# Altium PCB mimosa_host_fsr.PcbDoc
Units mil, origin at the board's own origin, x right, y up, seen from the top; angles counter-clockwise.
Board outline 1850.39 x 1850.39 mil, 2 copper layers (Top Layer, Bottom Layer), stack 33.8 mil thick; 50 components, 39 nets, 227 pads, 87 vias.
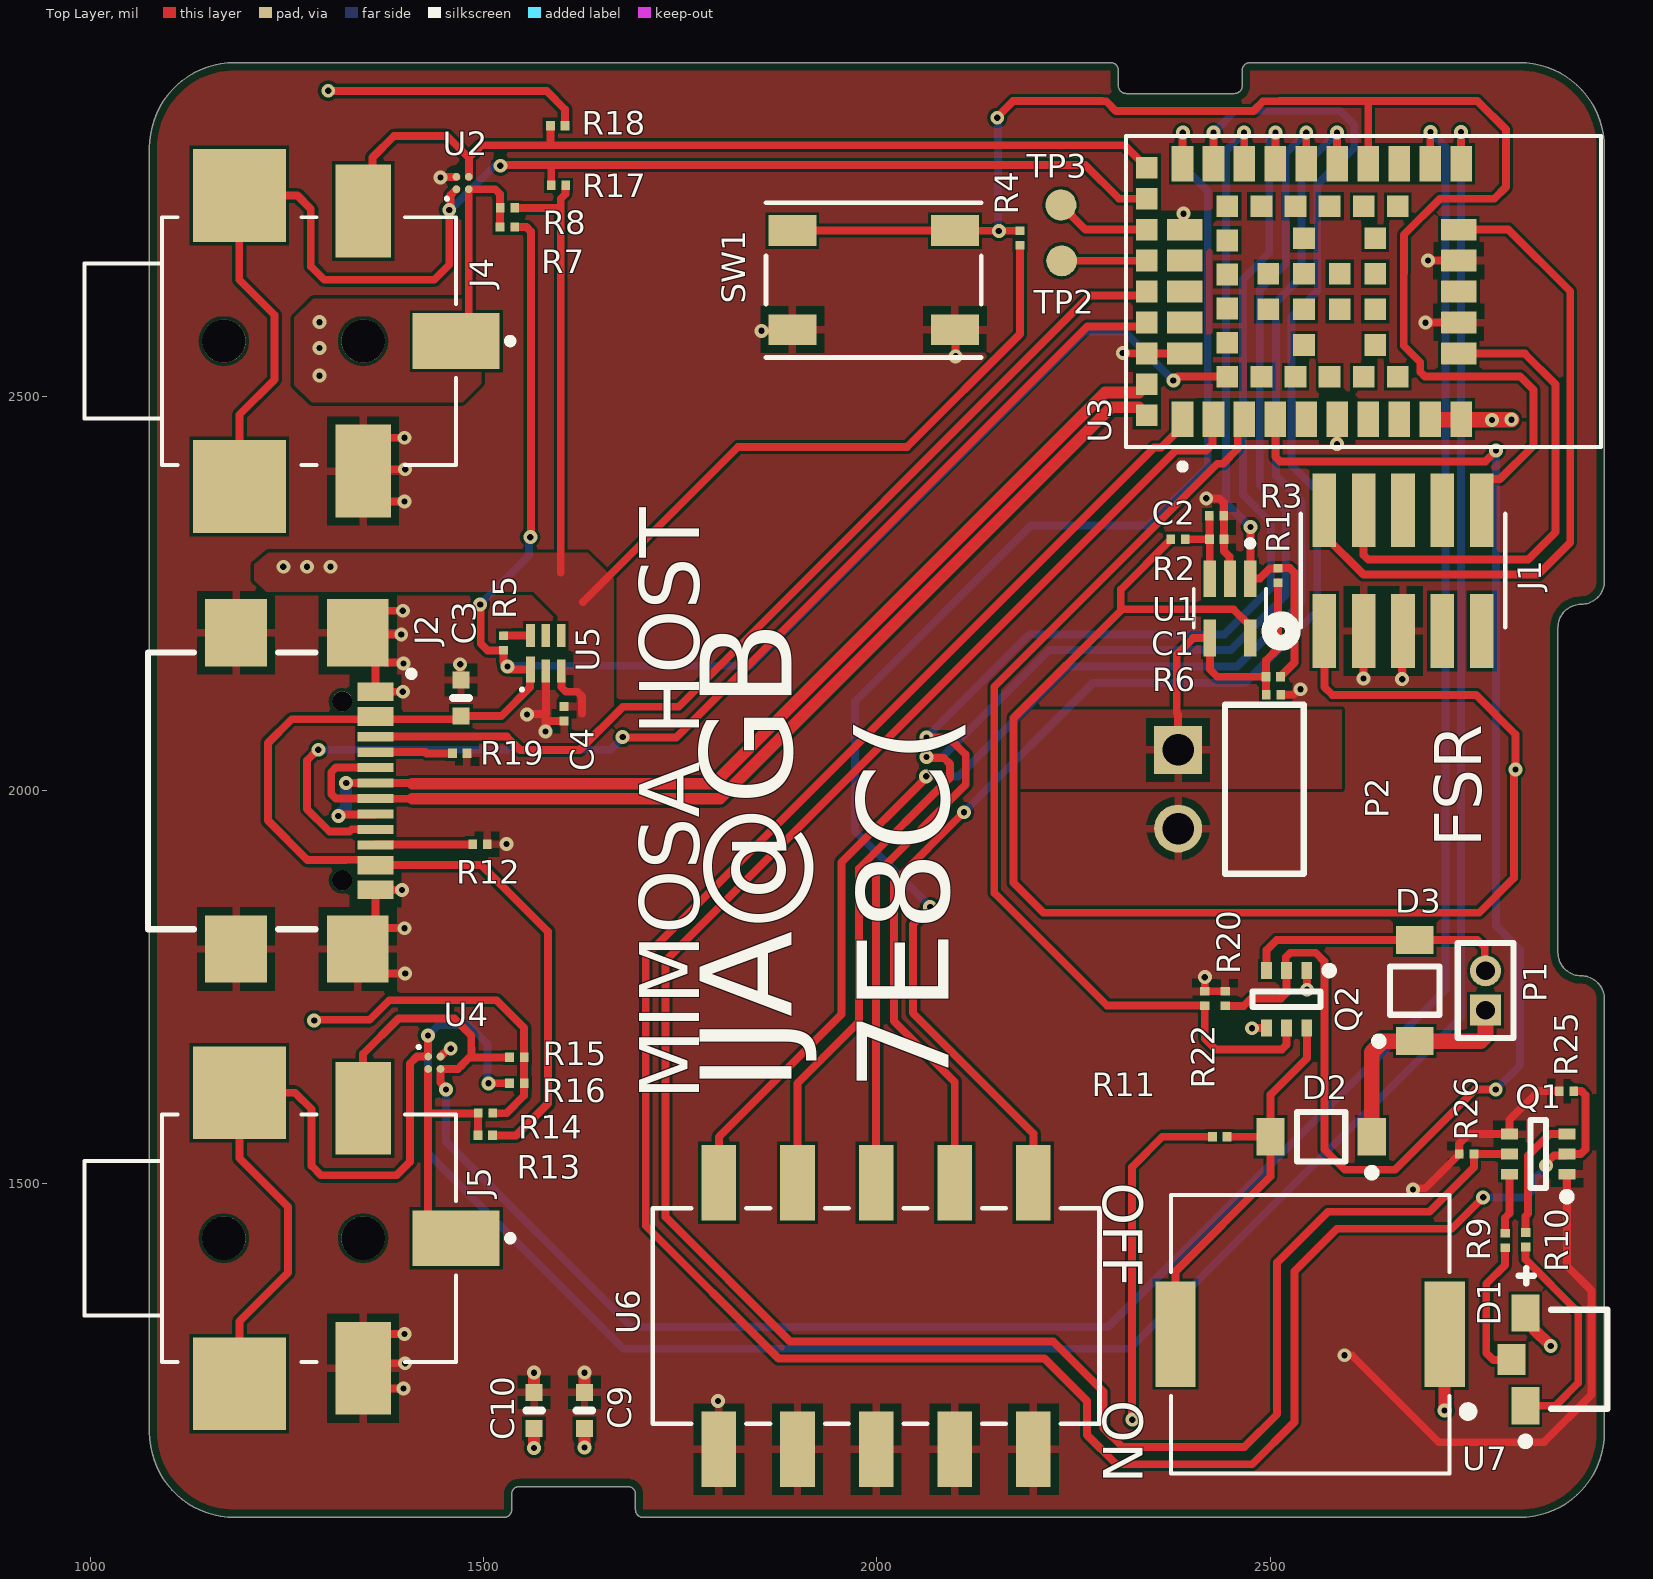
[diagram p0: Top Layer view]
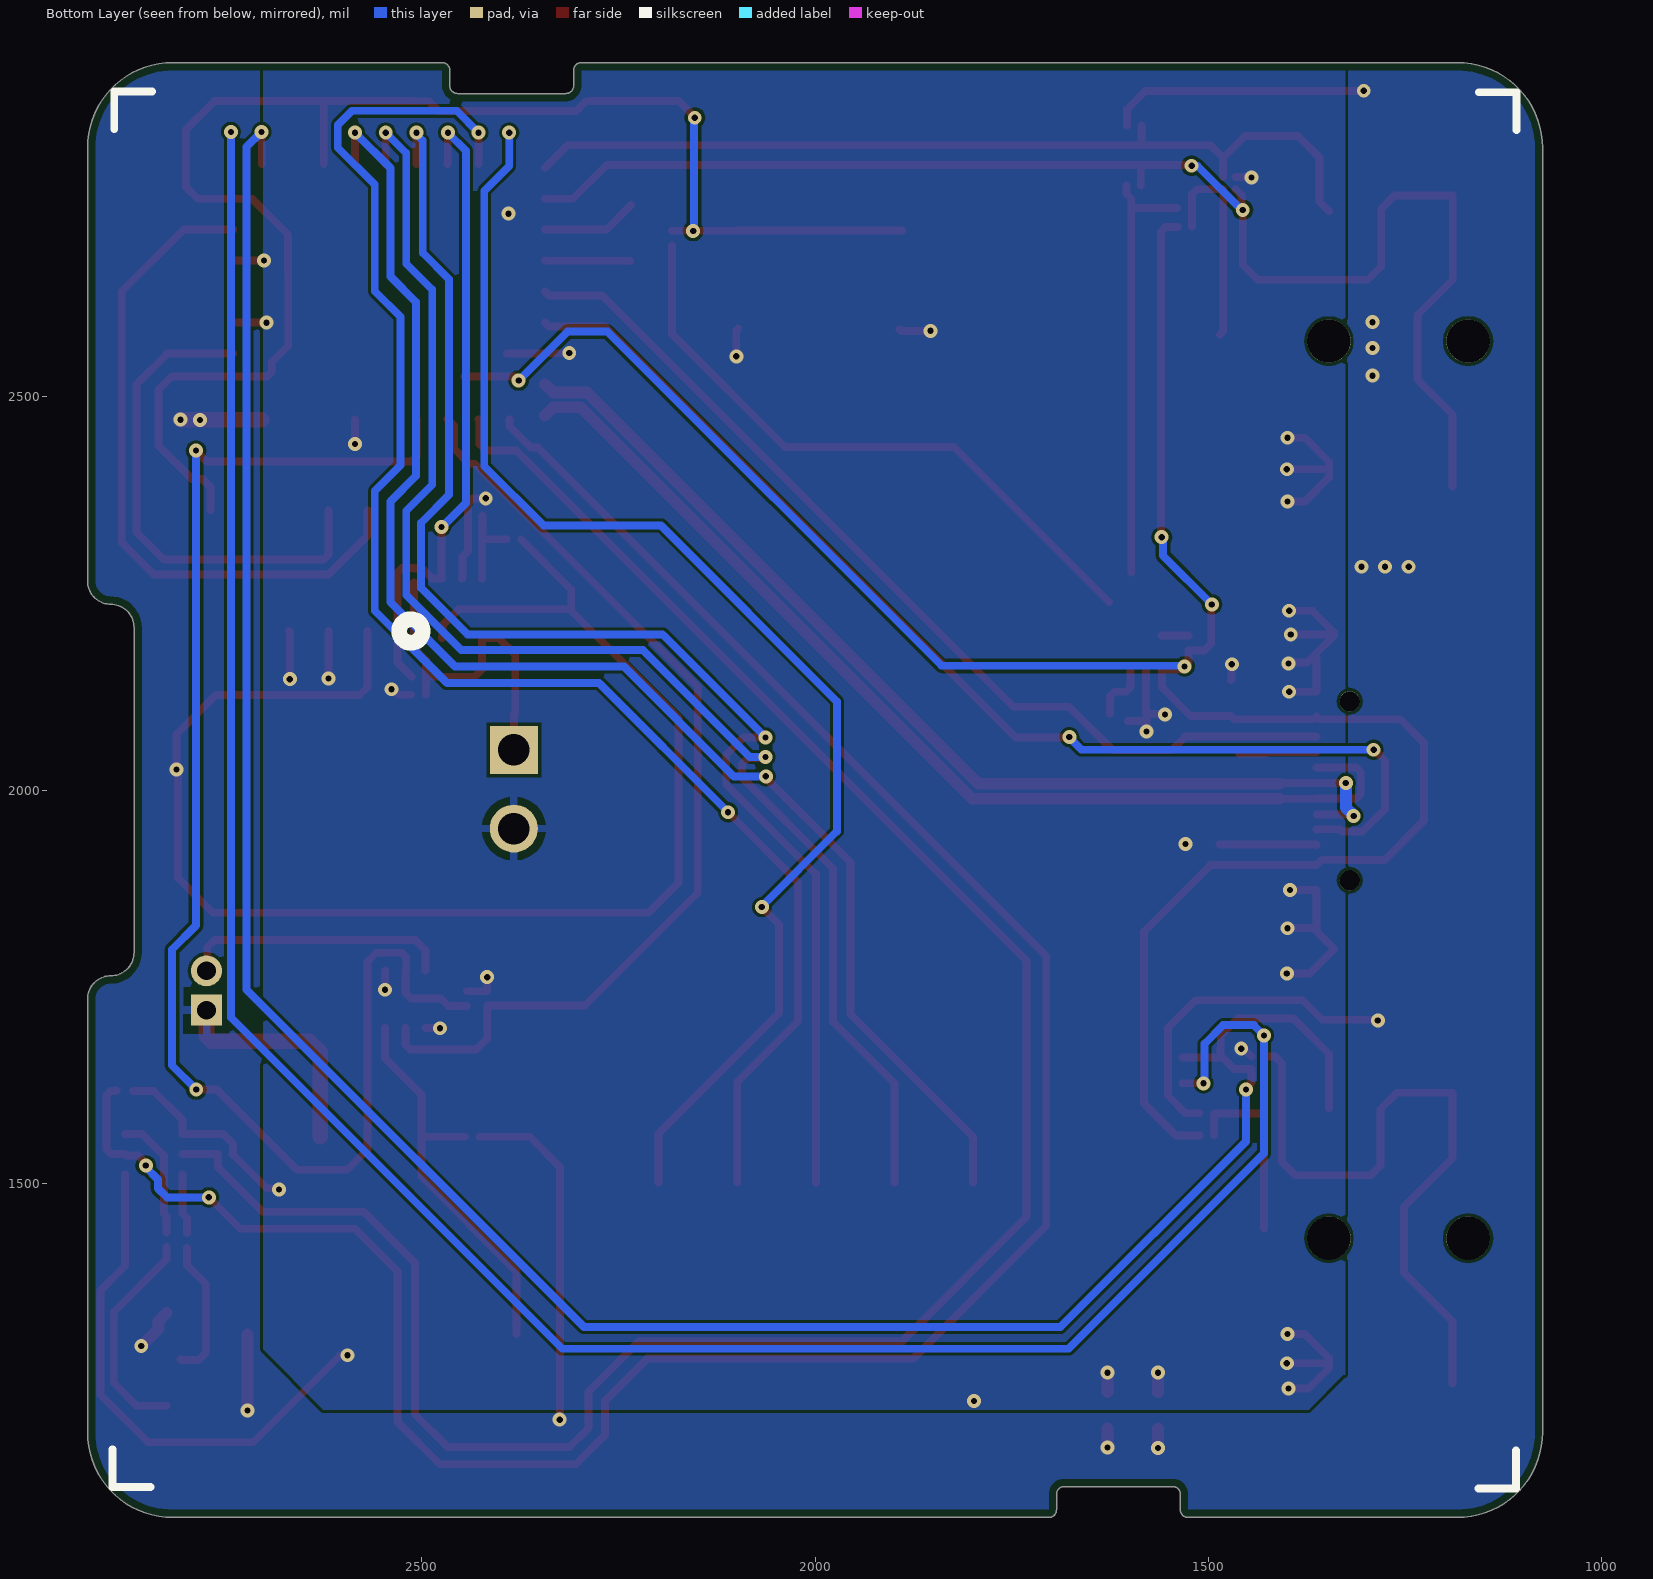
[diagram p1: Bottom Layer view, seen from below]
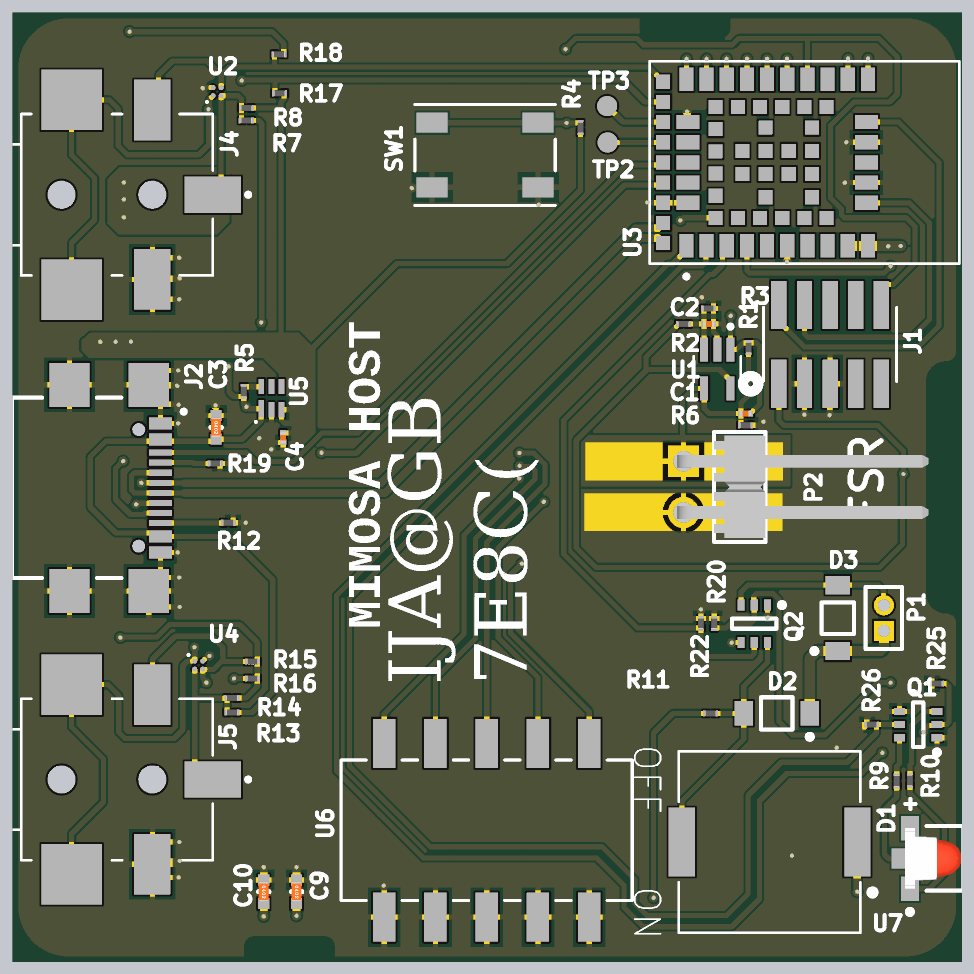
[diagram p2: 3D render of the assembled board from above, using the file's embedded part models]

## Layer stack, top to bottom
Top Solder: solder mask 0.4, Solder Resist, Dk 3.5
Top Layer: signal copper 1.4
Dielectric 1: dielectric 31, FR-4, Dk 4.4
Bottom Layer: signal copper 1.4
Bottom Solder: solder mask 0.4, Solder Resist, Dk 3.5

## Board outline
1183.07,1074.8 1525.59,1074.8 ccw(c1525.59,1084.65) 1535.43,1084.65 1535.43,1104.33 cw(c1545.28,1104.33) 1545.28,1114.17 1683.07,1114.17 cw(c1683.07,1104.33) 1692.91,1104.33 1692.91,1084.65 ccw(c1702.76,1084.65) 1702.76,1074.8 2816.93,1074.8 ccw(c2816.93,1183.07) 2925.2,1183.07 2925.2,1734.25 ccw(c2895.67,1734.25) 2895.67,1763.78 cw(c2895.67,1793.31) 2866.14,1793.31 2866.14,2206.69 cw(c2895.67,2206.69) 2895.67,2236.22 ccw(c2895.67,2265.75) 2925.2,2265.75 2925.2,2816.93 ccw(c2816.93,2816.93) 2816.93,2925.2 2474.41,2925.2 ccw(c2474.41,2915.35) 2464.57,2915.35 2464.57,2895.67 cw(c2454.72,2895.67) 2454.72,2885.83 2316.93,2885.83 cw(c2316.93,2895.67) 2307.09,2895.67 2307.09,2915.35 ccw(c2297.24,2915.35) 2297.24,2925.2 1183.07,2925.2 ccw(c1183.07,2816.93) 1074.8,2816.93 1074.8,1183.07 ccw(c1183.07,1183.07)

## Design rules (kind name [scope] priority, off if disabled: settings)
BoardOutlineClearance [All] p1: gap=10 ignorepadtopadclearanceinfootprint=FALSE except(0: Arc-SplitContinuation Track-SplitContinuation SMDPad-SplitContinuation THPad-SplitContinuation Via-SplitContinuation Fill-SplitContinuation Poly-SplitContinuation Region-SplitContinuation Text-SplitContinuation)
Clearance [All] p1: gap=4 ignorepadtopadclearanceinfootprint=FALSE
DiffPairsRouting [All] p1: maxlimit=8 minlimit=4 mostfreqgap=4 toplayer_minwidth=15 toplayer_maxwidth=25 toplayer_prefwidth=25 bottomlayer_minwidth=15 bottomlayer_maxwidth=25 bottomlayer_prefwidth=25 maxuncoupledlength=500
HoleSize [All] p1: absolutevalues=TRUE maxlimit=100 minlimit=7 maxpercent=80.000 minpercent=20.000
MinimumSolderMaskSliver [All] p1: minsoldermaskwidth=0
PolygonConnect PolygonConnect_1 [All] p1: thpad.connectstyle=Relief thpad.reliefconductorwidth=10 thpad.reliefentries=4 thpad.polygonreliefangle="90 Angle" thpad.airgapwidth=10 smdpad.connectstyle=Relief smdpad.reliefconductorwidth=10 smdpad.reliefentries=4 smdpad.polygonreliefangle="90 Angle" smdpad.airgapwidth=10 via.connectstyle=Direct via.reliefconductorwidth=10 via.reliefentries=4 via.polygonreliefangle="90 Angle" via.airgapwidth=10
RoutingVias [All] p1: holewidth=8 width=50 viastyle="Through Hole" minholewidth=7 minwidth=10 maxholewidth=28 maxwidth=50
SilkToSilkClearance [All] p1: silktosilkclearance=1
SilkToSolderMaskClearance [IsPad] p1: minsilkscreentomaskgap=1 clearancetoexposedcopper=TRUE
SolderMaskExpansion [All] p1: expansion=4 istentingtop=FALSE
Width [All] p1: maxlimit=100 minlimit=10 preferedwidth=10 minimp=50.000000 maximp=50.000000 favimp=50.000000
25 further rules are at their usual default settings.

## Classes and differential pairs
differential pair USB: +USB_P -USB_N

## Components (designator, comment, footprint, x,y, rotation, side; value= is the part's Value field where it differs from the comment)
C1 "0.10µF" SMD-0201C 2504,2144 r0 top
C2 "0.022µF" SMD-0201C 2432.25,2319 r0 top
C3 "10µF" SMD-0402C 1471,2117 r180 top
C4 "1µF" SMD-0201C 1602,2097 r270 top
C9 "10µF" SMD-0402C 1628,1211 r180 top
C10 "10µF" SMD-0402C 1564,1211 r180 top
D1 "APBDA3020SURKCGKC-GX" Kingbright_0_MFG 2870,1276 r90 top
D2 "BAT54T1G" ONSC-SOD-123-2-425-04_V 2565,1559 r180 top
D3 "BAT54T1G" ONSC-SOD-123-2-425-04_V 2684,1745 r90 top
J1 "20021121-00010C4LF" CONN_00010C4LF_A 2669,2279 r0 top
J2 "USB4110-GF-A" GCT_USB4110-GF-A 1320,1999 r270 top
J4 "SJ1-42534-SMT" *CUI_SJ1-42534-SMT_SJ1-42534-SMT(Primary) 1258,2571 r0 top
J5 "SJ1-42534-SMT" *CUI_SJ1-42534-SMT_SJ1-42534-SMT(Primary) 1258,1430 r0 top
P1 "MHDR1X2" MHDR1X2 2774,1720 r90 top
P2 "HMTSW-102-22-F-S-318-RA" SMTC-HMTSW-102-22-X-S-318-RA 2383,2051 r270 top
Q1 "NX3020NAKS,115" NXP-SOT363_N 2841,1537 r180 top
Q2 "NX3020NAKS,115" NXP-SOT363_N 2521,1734 r270 top
R1 "100k" SMD-0201-RES 2510,2273 r90 top
R2 "470k" SMD-0201-RES 2383,2319 r180 top
R3 "100k" SMD-0201-RES 2432,2349 r180 top
R4 "47k" SMD-0201-RES 2182,2702 r270 top
R5 "0.0" SMD-0201-RES 1525,2187 r270 top
R6 "5.1M" SMD-0201-RES 2504.27,2121.1 r180 top
R7 "0.0" SMD-0201-RES 1529.92,2716.07 r180 top
R8 "0.0" SMD-0201-RES 1530.05,2740.45 r180 top
R9 "1k" SMD-0201-RES 2799,1427 r270 top
R10 "1k" SMD-0201-RES 2825,1428 r270 top
R11 "1k" SMD-0201-RES 2436,1559.11 r180 top
R12 "5.1k" SMD-0201-RES 1495,1931 r180 top
R13 "0.0" SMD-0201-RES 1501.77,1560.89 r180 top
R14 "0.0" SMD-0201-RES 1502.04,1589.21 r180 top
R15 "4.7k" SMD-0201-RES 1542,1660 r180 top
R16 "4.7k" SMD-0201-RES 1542,1627 r180 top
R17 "4.7k" SMD-0201-RES 1595,2769 r0 top
R18 "4.7k" SMD-0201-RES 1594,2845 r0 top
R19 "5.1k" SMD-0201-RES 1469.36,2046.64 r180 top
R20 "47k" SMD-0201-RES 2443,1734.75 r270 top
R22 "47k" SMD-0201-RES 2417,1735 r270 top
R25 "47k" SMD-0201-RES 2877,1617 r0 top
R26 "47k" SMD-0201-RES 2750,1537 r0 top
SW1 "PTS647SK50SMTR2LFS" PTS647SK50SMTR2L 1995.79,2648.53 r180 top
TP2 "TP-SM-C-100" TP-SM-C-100 2235,2673 r90 top
TP3 "TP-SM-C-100" TP-SM-C-100 2234,2744 r90 top
U1 "TLV521DCKT" *SOT65P210X110-5N 2449,2231 r270 top
U2 "ESD7383NCTBG" ONSC-WLCSP-4-567CB-01 1473,2772 r90 top
U3 "NINA-B302-00B" NINA-B302-00B 2546.1,2634 r90 top
U4 "ESD7383NCTBG" ONSC-WLCSP-4-567CB-01 1437.13,1653.13 r0 top
U5 "TLV70233DSET" TI-DSE6_V 1579,2174 r90 top
U6 "219-5MST" SW5_219SMT 1999,1331 r270 top
U7 "PKMCS0909E4000-R1" XDCR_PKMCS0909E4000-R1 2551,1308 r180 top

## Footprints (in the part's own frame and the unit in brackets; to place one, negate y for a bottom-side part, rotate by r counter-clockwise, add the part's x,y. Pads: shape width x height; smd on the part's side, far side on the other; paste and mask are expansions set on the pad)
*CUI_SJ1-42534-SMT_SJ1-42534-SMT(Primary) [mm]
  rect 2.8x1.8 smd: 1(5.25,0)
  rect 1.8x3 smd: 2(2.25,-4.2) 3(2.25,4.2)
  rect 3x3 smd: 4(-1.75,-4.7) 4.1(-1.75,4.7)
  round 1.4 hole 1.4 unplated: None(-2.25,0) None(2.25,0)
  silkscreen extent -6.75,-4 7.1,4
*SOT65P210X110-5N [mm]
  rect 1.19x0.4 smd: 1(-0.96,0.65) 2(-0.96,0) 3(-0.96,-0.65) 4(0.96,-0.65) 5(0.96,0.65)
  silkscreen extent -2.2,-1.17 0.63,1.17
CONN_00010C4LF_A [mil]
  rect 30x94 smd: 1(-100,-76.77) 2(-100,76.77) 3(-50,-76.77) 4(-50,76.77) 5(0,-76.77) 6(0,76.77) 7(50,-76.77) 8(50,76.77) 9(100,-76.77) 10(100,76.77)
  silkscreen extent -170,-92 130,72, body extent 0,0 10,10, height 10
GCT_USB4110-GF-A [mm]
  rect 0.6x1.15 smd: A1/B12(-3.2,1.075) A4/B9(-2.4,1.075) B1/A12(3.2,1.075) B4/A9(2.4,1.075)
  rect 0.3x1.15 smd: A5(-1.25,1.075) A6(-0.25,1.075) A7(0.25,1.075) A8(1.25,1.075) B5(1.75,1.075) B6(0.75,1.075) B7(-0.75,1.075) B8(-1.75,1.075)
  rect 2.18x2 smd: S1(-5.11,0.5) S2(5.11,0.5) S3(-5.11,-3.43) S4(5.11,-3.43)
  round 0.65 hole 0.65 unplated: ""(-2.89,0) ""(2.89,0)
  silkscreen extent -4.47,-6.28 4.47,2.33
Kingbright_0_MFG [mm]
  rect 1.2x0.9 smd paste+0 mask+0: 1(1.5,1.15) 3(-1.5,1.15)
  rect 1x0.9 smd paste+0 mask+0: 2(0,1.6)
  silkscreen extent -2.77,-1.5 2.95,1.38, body extent -2.2,-1.6 2.2,2.15, height 0.25
MHDR1X2 [mm] "Connector; Header; 2 Position"
  rect 1x1 hole 0.6: 1(0,0)
  round 1 hole 0.6: 2(1.27,0)
  silkscreen extent -0.9,-0.9 2.17,0.9
NINA-B302-00B [mm]
  rect 1.15x0.7 smd: 1(-4.125,4) 2(-4.125,3) 3(-4.125,2) 4(-4.125,1) 5(-4.125,0) 6(-4.125,-1) 7(-4.125,-2) 8(-4.125,-3) 9(-4.125,-4) 10(-4.125,-5) 16(4.125,-5) 17(4.125,-4) 18(4.125,-3) 19(4.125,-2) 20(4.125,-1) 21(4.125,0) 22(4.125,1) 23(4.125,2) 24(4.125,3) 25(4.125,4)
  rect 0.7x1.15 smd: 11(-2,-4.925) 12(-1,-4.925) 13(0,-4.925) 14(1,-4.925) 15(2,-4.925) 26(2,3.925) 27(1,3.925) 28(0,3.925) 29(-1,3.925) 30(-2,3.925)
  rect 0.7x0.7 smd: 31(-2.75,2.55) 32(-2.75,1.45) 33(-2.75,0.35) 34(-2.75,-0.75) 35(-2.75,-1.85) 36(-2.75,-2.95) 37(2.75,-2.95) 38(2.75,-1.85) 39(2.75,-0.75) 40(2.75,0.35) 41(2.75,1.45) 42(2.75,2.55) 43(1.65,2.55) 44(0.55,2.55) 45(-0.55,2.55) 46(-1.65,2.55) 47(4,5.15) 48(3,5.15) 49(2,5.15) 50(1,5.15) 51(0,5.15) 52(-1,5.15) 53(-2,5.15) 54(-3,5.15) 55(-4,5.15) EGP1(-0.575,1.225) EGP2(0.575,1.225) EGP3(-1.725,0.075) EGP4(-0.575,0.075) EGP5(0.575,0.075) EGP6(1.725,0.075) EGP7(-0.575,-1.075) EGP8(0.575,-1.075) EGP9(-1.725,-2.225) EGP10(-0.575,-2.225) EGP11(0.575,-2.225) EGP12(1.725,-2.225)
  silkscreen extent -5.75,-9.53 5.02,5.82
NXP-SOT363_N [mm] "SOT23, 6-Leads, Body 2.2x1.35mm, Pitch 0.65mm, IPC Medium Density"
  rect 0.55x0.35 smd: 1(-0.925,0.65) 2(-0.925,0) 3(-0.925,-0.65) 4(0.925,-0.65) 5(0.925,0) 6(0.925,0.65)
  silkscreen extent -1.05,-1.1 0.25,1.5, body extent -0.67,-1.1 0.67,1.1, height 1.1
ONSC-SOD-123-2-425-04_V [mm] "SOD, 2-Leads, Body 2.69x1.6mm"
  rect 0.91x1.22 smd: 1(-1.635,0) 2(1.635,0)
  silkscreen extent -1.76,-0.8 0.78,1.28, body extent -1.35,-0.8 1.35,0.8, height 1.35
ONSC-WLCSP-4-567CB-01 [mm] "BGA, 4-Balls, Body 0.8x0.8mm, Pitch 0.4mm"
  round 0.25 smd: A1(-0.2,0.2) A2(0.2,0.2) B1(-0.2,-0.2) B2(0.2,-0.2)
  silkscreen extent -0.55,0.46 -0.46,0.55, body extent -0.4,-0.4 0.4,0.4, height 0.63
PTS647SK50SMTR2L [mil]
  rect 61x39 smd paste+0 mask+0: 1(-103.35,62.99) 2(103.35,62.99) 3(-103.35,-62.99) 4(103.35,-62.99)
  silkscreen extent -137,-99 137,99, body extent 0,0 10,10, height 10
SMD-0201-RES [mm] "SMD-0201-RES"
  rect 0.28x0.3 smd: 1(-0.235,0) 2(0.235,0)
  body extent -0.3,-0.15 0.3,0.15, height 0.3
SMD-0201C [mm] "SMD-0201"
  rect 0.28x0.3 smd: 1(-0.235,0) 2(0.235,0)
  body extent -0.3,-0.15 0.3,0.15, height 0.3
SMD-0402C [mm]
  rect 0.55x0.55 smd: 1(0,0.584) 2(0,-0.584)
  silkscreen extent -0.25,0 0.25,0, body extent -0.25,-0.51 0.25,0.51, height 0.51
SMTC-HMTSW-102-22-X-S-318-RA [mm] "Terminal Strip, 1x2 Pins, Right Angle, 2.54mm Pitch, Male"
  rect 1.55x1.55 hole 1.02: 1(0,0)
  round 1.55 hole 1.02: 2(2.54,0)
  silkscreen extent -1.46,1.52 4,4.06, body extent -1.27,-0.32 3.81,12.14, height 3.09
SW5_219SMT [mil]
  rect 96x44 smd: 1(-169.5,200) 2(-169.5,100) 3(-169.5,0) 4(-169.5,-100) 5(-169.5,-200) 6(169.5,-200) 7(169.5,-100) 8(169.5,0) 9(169.5,100) 10(169.5,200)
  silkscreen extent -137,-284 137,284, body extent 0,0 10,10, height 10
TI-DSE6_V [mm] "SON, 6-Leads, Body 1.5x1.5mm, Pitch 0.5mm"
  rect 0.85x0.28 smd: 1(-0.525,0.5)
  rect 0.75x0.28 smd: 2(-0.575,0) 3(-0.575,-0.5) 4(0.575,-0.5) 5(0.575,0) 6(0.575,0.5)
  silkscreen extent -1.22,0.72 -1.13,0.82, body extent -0.75,-0.75 0.75,0.75, height 0.8
TP-SM-C-100 [mm] "Test Point, Surface Mounting, Circular, Pad Diameter 1mm"
  round 1 smd: 1(0,0)
XDCR_PKMCS0909E4000-R1 [mm]
  rect 1.3x3.4 smd: 1(-4.35,0) 2(4.35,0)
  silkscreen extent -5.25,-4.5 4.5,4.5

## Part data
C1: library part GRT033C81A104KE01D, "CAP CER 0.1UF 10V X6S 0201", Digi-Key Part Number=490-12232-1-ND, Manufacturer="Murata Electronics North America", Operating Temperature="-55°C ~ 105°C", Package / Case="0.024\" L x 0.012\" W (0.60mm x 0.30mm)", Ratings=AEC-Q200, Temperature Coefficient=X6S, Tolerance=±10%, Voltage=10V, @ qty=0, Applications=Automotive, Datasheets=http://search.murata.co.jp/Ceramy/image/img/A01X/G101/ENG/GRT033C81A104KE01-01.pdf, Factory Stock=0, Failure Rate="Surface Mount, MLCC", Features=-, Height - Seated (Max)="0.013\" (0.33mm)", Image=//media.digikey.com/Renders/Murata%20Renders/GRT%20Series%200201%20(0603%20Metric).jpg, Lead Spacing=-, Minimum Quantity=1, Mounting Type="0201 (0603 Metric)", Packaging="Cut Tape (CT)", Part Number=GRT033C81A104KE01D, Part Status=Active, Quantity Available=1647, Series=GRT, Size / Dimension=-, Thickness (Max)=-, Unit Price (USD)=0.1
C2: library part GRM033C80J223KE01D, "CAP CER 0.022UF 6.3V X6S 0201", Digi-Key Part Number=490-8154-1-ND, Manufacturer="Murata Electronics North America", Operating Temperature="-55°C ~ 105°C", Package / Case="0.024\" L x 0.012\" W (0.60mm x 0.30mm)", Ratings=-, Temperature Coefficient=X6S, Tolerance=±10%, Voltage=6.3V, @ qty=0, Applications="General Purpose", Datasheets=http://www.murata.com/~/media/webrenewal/support/library/catalog/products/capacitor/mlcc/c02e.pdf, Factory Stock=0, Failure Rate="Surface Mount, MLCC", Features=-, Height - Seated (Max)="0.013\" (0.33mm)", Image=//media.digikey.com/Renders/Murata%20Renders/ZRB-SERIES-0402.jpg, Lead Spacing=-, Minimum Quantity=1, Mounting Type="0201 (0603 Metric)", Packaging="Cut Tape (CT)", Part Number=GRM033C80J223KE01D, Part Status=Active, Quantity Available=18738, Series=GRM, Size / Dimension=-, Thickness (Max)=-, Unit Price (USD)=0.1
C3 C9 C10: library part GRJ155R60J106ME11D, "CAP CER 10UF 6.3V X5R 0402", Digi-Key Part Number=490-13211-1-ND, Manufacturer="Murata Electronics North America", Operating Temperature="-55°C ~ 85°C", Package / Case="0402 (1005 Metric)", Ratings=-, Temperature Coefficient=X5R, Tolerance=±20%, Voltage=6.3V, @ qty=0, Applications="Boardflex Sensitive", Datasheets=http://psearch.en.murata.com/capacitor/product/GRJ155R60J106ME11%23.pdf, Factory Stock=0, Features="Derating Recommended, Soft Termination", Height - Seated (Max)=-, Image=//media.digikey.com/Renders/Murata%20Renders/ZRB-SERIES-0402.jpg, Lead Spacing=-, Lead Style=-, Minimum Quantity=1, Mounting Type="Surface Mount, MLCC", Packaging="Cut Tape (CT)", Part Status=Active, Quantity Available=64064, Series=GRJ, Size / Dimension="0.039\" L x 0.020\" W (1.00mm x 0.50mm)", Thickness (Max)="0.028\" (0.70mm)", Unit Price (USD)=0.23
  C3: MPN=GRJ155R60J106ME11D
  C9 C10: Part Number=GRJ155R60J106ME11D
C4: library part GRM033R60J105MEA2D, "CAP CER 1UF 6.3V X5R 0201", Digi-Key Part Number=490-7229-1-ND, Manufacturer="Murata Electronics North America", Operating Temperature="-55°C ~ 85°C", Package / Case="0.024\" L x 0.012\" W (0.60mm x 0.30mm)", Ratings=-, Temperature Coefficient=X5R, Tolerance=±20%, Voltage=6.3V, @ qty=0, Applications="General Purpose", Datasheets=http://www.murata.com/~/media/webrenewal/support/library/catalog/products/capacitor/mlcc/c02e.pdf, Factory Stock=0, Failure Rate="Surface Mount, MLCC", Features="Derating Recommended", Height - Seated (Max)="0.013\" (0.33mm)", Image=//media.digikey.com/Renders/Murata%20Renders/ZRB-SERIES-0402.jpg, Lead Spacing=-, Minimum Quantity=1, Mounting Type="0201 (0603 Metric)", Packaging="Cut Tape (CT)", Part Number=GRM033R60J105MEA2D, Part Status=Active, Quantity Available=223818, Series=GRM, Size / Dimension=-, Thickness (Max)=-, Unit Price (USD)=0.12
D2 D3: "Schottky Barrier Diode, 2-Pin SOD-123, Pb-Free, Tape and Reel", Manufacturer="On Semiconductor", Supplier Part Number 1=BAT54T1GOSTR-ND, ComponentLink1Description="Manufacturer URL", ComponentLink1URL=http://www.onsemi.com/, ComponentLink2Description=Datasheet, ComponentLink2URL=http://www.onsemi.cn/pub_link/Collateral/BAT54T1-D.PDF, ComponentLink3Description="Package Specification", ComponentLink3URL=http://www.onsemi.com/pub_link/Collateral/425-04.PDF, Configuration=Single, DatasheetVersion="Rev. 9", IFSM Max (A)=0.6, Mounting Technology="Surface Mount", PackageDescription="2-Pin SOD, Body 1.6 x 2.69 mm", PackageReference=SOD-123-2-425-04, PackageVersion="Rev. G, 10/2009", Packing="Tape and Reel", Part Number=BAT54T1G, RoHS=TRUE, Supplier 1=Digi-Key, Supplier 2=Digi-Key, Supplier 3=Digi-Key, Supplier 4=Farnell, Supplier 5=Farnell, Supplier 6=Farnell, Supplier 7=Newark, Supplier 8=Newark, Supplier 9=Mouser, Supplier Part Number 2=BAT54T1GOSCT-ND, Supplier Part Number 3=BAT54T1GOSDKR-ND, Supplier Part Number 4=1651157RL, Supplier Part Number 5=1651157, Supplier Part Number 6=2364774, Supplier Part Number 7=67R1284, Supplier Part Number 8=88H4554, Supplier Part Number 9=863-BAT54T1G, trr Max (ns)=5
J1: library part 20021121-00010C4, "No Description Available", Built_By=EMA_Matt, Copyright="Copyright (C) 2018 Accelerated Designs. All rights reserved", Manufacturer_Part_Number=20021121-00010C4LF, RefDes=RefDes, SourceLibrary=Amphenol_2019-10-30, Type=DEV, Vendor=Amphenol
J2: "USB-C _USB TYPE-C_ USB 2.0 Receptacle Connector 24 _16+8 Dummy_ Position Surface Mount, Right Angle; Through Hole", Package=None, Digi-Key_Part_Number=2073-USB4110-GF-A-1-ND, Digi-Key_Purchase_URL=https://www.digikey.com/product-detail/en/gct/USB4110-GF-A/2073-USB4110-GF-A-1-ND/10384548?utm_source=snapeda&utm_medium=aggregator&utm_campaign=symbol, MF=GCT, MP=USB4110-GF-A, SnapEDA_Link=https://www.snapeda.com/parts/USB4110-GF-A/Global%20Connector%20Technology/view-part/4001167/?ref=snap
J4 J5: "2.5 mm, 4 Conductors, Right Angle, Surface Mount _SMT_, Audio Jack Connector", Manufacturer="CUI Devices", Package=None, Part Number=SJ1-42534-SMT-TR, CUI_purchase_URL=https://www.cuidevices.com/product/interconnect/connectors/audio-connectors/jacks/sj1-4253x-smt-series?utm_source=snapeda.com&utm_medium=referral&utm_campaign=snapedaBOM, Digi-Key_Part_Number=CP1-42534SJCT-ND, Digi-Key_Purchase_URL=https://www.digikey.com/product-detail/en/cui-devices/SJ1-42534-SMT-TR/CP1-42534SJCT-ND/659931?utm_source=snapeda&utm_medium=aggregator&utm_campaign=symbol, SnapEDA_Link=https://www.snapeda.com/parts/SJ1-42534-SMT-TR/CUI%20Devices/view-part/?ref=snap
P1: "Header, 2-Pin", LatestRevisionDate=17-Jul-2002, LatestRevisionNote="Re-released for DXP Platform.", Publisher="Altium Limited"
P2: "Modified .025\" SQ Post Header, Through-hole, Right Angle, -55 to 125 degC, 2.54 mm Pitch, 2-Pin, Male, RoHS", Manufacturer=Samtec, Temperature Range="-55 to 125 degC", ComponentLink1Description="Manufacturer URL", ComponentLink1URL=http://www.samtec.com, ComponentLink2Description=Datasheet, ComponentLink2URL=http://www.samtec.com/documents/webfiles/pdf/HMTSW.PDF, ComponentLink3Description="Package Specification", ComponentLink3URL=http://www.samtec.com/documents/webfiles/cpdf/HMTSW-XXX-XX-X-X-XXXX-XX-XX-MKT1.pdf, DatasheetVersion=F-214, Mounting Technology=Through-hole, Orientation="Right Angle", PackageDescription="Assembly .025 [.64] SQ. Post Hi-Temp Terminal Strip", PackageReference=HMTSW-102-22-X-S-318-RA, PackageVersion="AL, 3/1987", PartNumber=HMTSW-102-22-F-S-318-RA, Pitch="2.54 mm", RoHS=True
Q1 Q2: "Dual N-Channel Trench MOSFET, 30 V, 0.18 A, -55 to 150 degC, 6-Pin SOT363, Tape and Reel", Manufacturer="NXP Semiconductors", Supplier Part Number 1=568-10505-2-ND, Channel Type=N, Ciss [typ] (pF)=13, Code_JEITA=SC-88, ComponentLink1Description="Manufacturer URL", ComponentLink1URL=http://www.nxp.com/, ComponentLink2Description=Datasheet, ComponentLink2URL=http://www.nxp.com/documents/data_sheet/NX3020NAKS.pdf, ComponentLink3Description="Package Specification", ComponentLink3URL=http://www.nxp.com/documents/outline_drawing/sot363_po.pdf, Coss [typ] (pF)=2.6, DatasheetVersion="Rev. 3", ID [max] (A)=0.18, Mounting Technology="Surface Mount", PackageDescription="6-Pin Small Outline Transistor Package, Body 2 x 1.25 mm, Pitch 0.65 mm", PackageReference=SOT363, PackageVersion="06-03-16, 03/2006", Packing="Tape & Reel", Part Number=NX3020NAKS,115, Supplier 1=Digi-Key, Supplier 2=Digi-Key, Supplier 3=Digi-Key, Supplier 4=Mouser, Supplier Part Number 2=568-10505-1-ND, Supplier Part Number 3=568-10505-6-ND, Supplier Part Number 4=771-NX3020NAKS115, VDS [max] (V)=30, VGSth [typ] (V)=1.2
R1 R3: library part ERJ-1GEF1003C, "RES SMD 100K OHM 1% 1/20W 0201", Digi-Key Part Number=P100KABCT-ND, Manufacturer="Panasonic Electronic Components", Operating Temperature="-55°C ~ 125°C", Package / Case="0201 (0603 Metric)", Power (Watts)="0.05W, 1/20W", Supplier Device Package=0201, Temperature Coefficient=±200ppm/°C, Tolerance=±1%, @ qty=1500, Composition="Thick Film", Datasheets=//media.digikey.com/pdf/Data%20Sheets/Panasonic%20Resistors%20Thermistors%20PDFs/ERJ_G,R,E_Rev08.pdf, Factory Stock=0, Failure Rate=-, Features=-, Height - Seated (Max)="0.010\" (0.26mm)", Image=//media.digikey.com/Renders/Panasonic%20Renders/ERJ-0201%20Pkg.jpg, Minimum Quantity=1, Number of Terminations=2, Packaging="Cut Tape (CT)", Part Number=ERJ-1GEF1003C, Part Status=Active, Quantity Available=3284120, Series=ERJ, Size / Dimension="0.024\" L x 0.012\" W (0.60mm x 0.30mm)", Unit Price (USD)=0.00933
R2: library part ERJ-1GEF4703C, "RES SMD 470K OHM 1% 1/20W 0201", Digi-Key Part Number=P470KABCT-ND, Manufacturer="Panasonic Electronic Components", Operating Temperature="-55°C ~ 125°C", Package / Case="0201 (0603 Metric)", Power (Watts)="0.05W, 1/20W", Supplier Device Package=0201, Temperature Coefficient=±200ppm/°C, Tolerance=±1%, @ qty=1500, Composition="Thick Film", Datasheets=//media.digikey.com/pdf/Data%20Sheets/Panasonic%20Resistors%20Thermistors%20PDFs/ERJ_G,R,E_Rev08.pdf, Factory Stock=0, Failure Rate=-, Features=-, Height - Seated (Max)="0.010\" (0.26mm)", Image=//media.digikey.com/Renders/Panasonic%20Renders/ERJ-0201%20Pkg.jpg, Minimum Quantity=1, Number of Terminations=2, Packaging="Cut Tape (CT)", Part Number=ERJ-1GEF4703C, Part Status=Active, Quantity Available=12534, Series=ERJ, Size / Dimension="0.024\" L x 0.012\" W (0.60mm x 0.30mm)", Unit Price (USD)=0.00933
R4 R20 R22 R25 R26: library part ERJ-1GEF4702C, "RES SMD 47K OHM 1% 1/20W 0201", Digi-Key Part Number=P47.0KABCT-ND, Manufacturer="Panasonic Electronic Components", Operating Temperature="-55°C ~ 125°C", Package / Case="0201 (0603 Metric)", Power (Watts)="0.05W, 1/20W", Supplier Device Package=0201, Temperature Coefficient=±200ppm/°C, Tolerance=±1%, @ qty=1500, Composition="Thick Film", Datasheets=//media.digikey.com/pdf/Data%20Sheets/Panasonic%20Resistors%20Thermistors%20PDFs/ERJ_G,R,E_Rev08.pdf, Factory Stock=0, Failure Rate=-, Features=-, Height - Seated (Max)="0.010\" (0.26mm)", Image=//media.digikey.com/Renders/Panasonic%20Renders/ERJ-0201%20Pkg.jpg, Minimum Quantity=1, Number of Terminations=2, Packaging="Cut Tape (CT)", Part Number=ERJ-1GEF4702C, Part Status=Active, Quantity Available=276878, Series=ERJ, Size / Dimension="0.024\" L x 0.012\" W (0.60mm x 0.30mm)", Unit Price (USD)=0.00933
R5 R7 R8 R13 R14: library part ERJ-1GE0R00C, "RES SMD 0.0OHM JUMPER 1/20W 0201", Digi-Key Part Number=P0.0AGCT-ND, Manufacturer="Panasonic Electronic Components", Operating Temperature="-55°C ~ 125°C", Package / Case="0201 (0603 Metric)", Power (Watts)="0.05W, 1/20W", Supplier Device Package=0201, Temperature Coefficient=-, Tolerance=Jumper, @ qty=1500, Composition="Thick Film", Datasheets=//media.digikey.com/pdf/Data%20Sheets/Panasonic%20Resistors%20Thermistors%20PDFs/ERJ_G_Rev06.pdf, Factory Stock=0, Failure Rate=-, Features=-, Height - Seated (Max)="0.010\" (0.26mm)", Image=//media.digikey.com/Renders/Panasonic%20Renders/ERJ-0201%20Pkg.jpg, Minimum Quantity=1, Number of Terminations=2, Packaging="Cut Tape (CT)", Part Number=ERJ-1GE0R00C, Part Status=Active, Quantity Available=2883022, Series=ERJ, Size / Dimension="0.024\" L x 0.012\" W (0.60mm x 0.30mm)", Unit Price (USD)=0.00960
R6: library part ERJ-1GEJ515C, "RES SMD 5.1M OHM 5% 1/20W 0201", Digi-Key Part Number=P5.1MAGCT-ND, Manufacturer="Panasonic Electronic Components", Operating Temperature="-55°C ~ 125°C", Package / Case="0201 (0603 Metric)", Power (Watts)="0.05W, 1/20W", Supplier Device Package=0201, Temperature Coefficient="-400/ +150ppm/°C", Tolerance=±5%, @ qty=1500, Composition="Thick Film", Datasheets=//media.digikey.com/pdf/Data%20Sheets/Panasonic%20Resistors%20Thermistors%20PDFs/ERJ%205%25.pdf, Factory Stock=0, Failure Rate=-, Features=-, Height - Seated (Max)="0.010\" (0.26mm)", Image=//media.digikey.com/Renders/Panasonic%20Renders/ERJ-0201%20Pkg.jpg, Minimum Quantity=1, Number of Terminations=2, Packaging="Cut Tape (CT)", Part Number=ERJ-1GEJ515C, Part Status=Active, Quantity Available=316490, Series=ERJ, Size / Dimension="0.024\" L x 0.012\" W (0.60mm x 0.30mm)", Unit Price (USD)=0.00787
R9 R10 R11: library part ERJ-1GEF1001C, "RES SMD 1K OHM 1% 1/20W 0201", Digi-Key Part Number=P1.00KABCT-ND, Manufacturer="Panasonic Electronic Components", Operating Temperature="-55°C ~ 125°C", Package / Case="0201 (0603 Metric)", Power (Watts)="0.05W, 1/20W", Supplier Device Package=0201, Temperature Coefficient=±200ppm/°C, Tolerance=±1%, @ qty=1500, Composition="Thick Film", Datasheets=//media.digikey.com/pdf/Data%20Sheets/Panasonic%20Resistors%20Thermistors%20PDFs/ERJ_G,R,E_Rev08.pdf, Factory Stock=0, Failure Rate=-, Features=-, Height - Seated (Max)="0.010\" (0.26mm)", Image=//media.digikey.com/Renders/Panasonic%20Renders/ERJ-0201%20Pkg.jpg, Minimum Quantity=1, Number of Terminations=2, Packaging="Cut Tape (CT)", Part Number=ERJ-1GEF1001C, Part Status=Active, Quantity Available=359548, Series=ERJ, Size / Dimension="0.024\" L x 0.012\" W (0.60mm x 0.30mm)", Unit Price (USD)=0.00933
R12 R19: library part ERJ-1GEF5101C, "RES SMD 5.1K OHM 1% 1/20W 0201", Digi-Key Part Number=P5.10KABCT-ND, Manufacturer="Panasonic Electronic Components", Operating Temperature="-55°C ~ 125°C", Package / Case="0201 (0603 Metric)", Power (Watts)="0.05W, 1/20W", Supplier Device Package=0201, Temperature Coefficient=±200ppm/°C, Tolerance=±1%, @ qty=1500, Composition="Thick Film", Datasheets=//media.digikey.com/pdf/Data%20Sheets/Panasonic%20Resistors%20Thermistors%20PDFs/ERJ_G,R,E_Rev08.pdf, Factory Stock=0, Failure Rate=-, Features=-, Height - Seated (Max)="0.010\" (0.26mm)", Image=//media.digikey.com/Renders/Panasonic%20Renders/ERJ-0201%20Pkg.jpg, Minimum Quantity=1, Number of Terminations=2, Packaging="Cut Tape (CT)", Part Number=ERJ-1GEF5101C, Part Status=Active, Quantity Available=106914, Series=ERJ, Size / Dimension="0.024\" L x 0.012\" W (0.60mm x 0.30mm)", Unit Price (USD)=0.00933
R15 R16 R17 R18: library part ERJ-1GEF4701C, "RES SMD 4.7K OHM 1% 1/20W 0201", Digi-Key Part Number=P4.70KABCT-ND, Manufacturer="Panasonic Electronic Components", Operating Temperature="-55°C ~ 125°C", Package / Case="0201 (0603 Metric)", Power (Watts)="0.05W, 1/20W", Supplier Device Package=0201, Temperature Coefficient=±200ppm/°C, Tolerance=±1%, @ qty=1500, Composition="Thick Film", Datasheets=//media.digikey.com/pdf/Data%20Sheets/Panasonic%20Resistors%20Thermistors%20PDFs/ERJ_G,R,E_Rev08.pdf, Factory Stock=0, Failure Rate=-, Features=-, Height - Seated (Max)="0.010\" (0.26mm)", Image=//media.digikey.com/Renders/Panasonic%20Renders/ERJ-0201%20Pkg.jpg, Minimum Quantity=1, Number of Terminations=2, Packaging="Cut Tape (CT)", Part Number=ERJ-1GEF4701C, Part Status=Active, Quantity Available=760979, Series=ERJ, Size / Dimension="0.024\" L x 0.012\" W (0.60mm x 0.30mm)", Unit Price (USD)=0.00933
SW1: library part PTS647SK50SMTR2L, "No Description Available", Built_By=EMA_Cory, Copyright="Copyright (C) 2018 Accelerated Designs. All rights reserved", Datasheet=https://dznh3ojzb2azq.cloudfront.net/products/Tactile/PTS647/documents/datasheet.pdf, Manufacturer_Part_Number=PTS647SK50SMTR2LFS, RefDes=RefDes, SourceLibrary=C&K_2020-03-19, Type=DEV, Vendor=C&K
TP2 TP3: library part CMP-0484-00002-2, "Test Point, Surface Mount, Circular, Pad Diameter 1 mm", Manufacturer="No Vendor", PartNumber=TP-SM-C-100
U2 U4: "USB-OTG 3-Line Protection, 4-Pin WLCSP, Pb-Free, Tape and Reel", Manufacturer="On Semiconductor", Supplier Part Number 1=ESD7383NCTBG-ND, C Max (pF)=1.5, ComponentLink1Description="Manufacturer URL", ComponentLink1URL=http://www.onsemi.com/, ComponentLink2Description=Datasheet, ComponentLink2URL=http://www.onsemi.cn/pub_link/Collateral/ESD7383-D.PDF, ComponentLink3Description="Package Specification", ComponentLink3URL=http://www.onsemi.cn/pub_link/Collateral/567CB.PDF, DatasheetVersion="Rev. 0", Direction=Bidirectional, IR Max (uA)=0.1, Mounting Technology="Surface Mount", Number of Lines=3, PackageDescription="4-Ball Wafer Level Chip Scale Package, Body 0.8 x 0.8 mm, Pitch 0.4 mm", PackageReference=WLCSP-4-567CB-01, PackageVersion="Rev. O, 07/2010", Packing="Tape and Reel", PartNumber=ESD7383NCTBG, PPK Max (W)=50, RoHS=Pb-Free, Supplier 1=Digi-Key, Supplier 2=Mouser, Supplier Part Number 2=863-ESD7383NCTBG, V(BR) Min (V)=6
U3: library part NINA-B311-00B, "Bluetooth Bluetooth v5.0 Transceiver Module 2.4GHz Antenna Not Included Surface Mount", Manufacturer="U-Blox America Inc.", Package="SMD-55 U-Blox America Inc.", Availability=Unavailable, Part Number=NINA-B302-00B, Price=None, SnapEDA_Link=https://www.snapeda.com/parts/NINA-B311-00B/U-Blox%20America%20Inc./view-part/3219108/?ref=snap
U5: "Single Output LDO, 300 mA, Fixed 3.3 V Output, 2 to 5.5 V Input, with Low IQ, 6-pin WSON (DSE), -40 to 125 degC, Green (RoHS & no Sb/Br)", Manufacturer="Texas Instruments", Supplier Part Number 1=296-32416-2-ND, Accuracy(%)=2, ComponentLink1Description="Manufacturer URL", ComponentLink1URL=http://www.ti.com/, ComponentLink2Description=Datasheet, ComponentLink2URL=http://www.ti.com/general/docs/lit/getliterature.tsp?genericPartNumber=TLV70233&fileType=pdf, ComponentLink3Description="Package Specification", ComponentLink3URL=http://www.ti.com/litv/pdf/mpds287, DatasheetVersion=SLVSAG6B, Eco-Plan="Green (RoHS & no Sb/Br)", Fixed Output Options(V)=3.3, Iout(Max)(A)=0.3, Iq(Typ)(mA)=0.03, Mounting Technology="Surface Mount", PackageDescription="6-Pin Plastic Small Outline, Body 1.5 x 1.5 mm, Pitch 0.5 mm", PackageReference=DSE6, PackageVersion=4207810/A, Part Number=TLV70233DSET, SubFamily="Single Channel LDO", Supplier 1=Digi-Key, Supplier 2=Digi-Key, Supplier 3=Digi-Key, Supplier 4=Newark, Supplier 5=Mouser, Supplier Part Number 2=296-32416-1-ND, Supplier Part Number 3=296-32416-6-ND, Supplier Part Number 4=87T3942, Supplier Part Number 5=595-TLV70233DSET, Vdo(Typ)(mV)=220, Vin(Max)(V)=5.5, Vin(Min)(V)=2, Vout Adj(Max)(V)=3.3, Vout Adj(Min)(V)=3.3
U6: "No Description Available", Built_By=EMA_Justin, Copyright="Copyright (C) 2016 Accelerated Designs. All rights reserved", Manufacturer_Part_Number=219-5MST, RefDes=RefDes, SourceLibrary=CTS_Components_2018-12-15, Type=DEV, Vendor="CTS Components"
U7: "Buzzers Transducer, Externally Driven Piezo 1.5V 4kHz 65dB @ 1.5V, 10cm Surface Mount Solder Pads", Package="2010 Murata", Digi-Key_Part_Number=490-9647-1-ND, Digi-Key_Purchase_URL=https://www.digikey.com/product-detail/en/murata-electronics/PKMCS0909E4000-R1/490-9647-1-ND/4878401?utm_source=snapeda&utm_medium=aggregator&utm_campaign=symbol, MF=Murata, MP=PKMCS0909E4000-R1, SnapEDA_Link=https://www.snapeda.com/parts/PKMCS0909E4000-R1/Murata%20Electronics%20North%20America/view-part/277291/?ref=snap
U1: SnapEDA_Link=https://www.snapeda.com/parts/TLV521DCKT/Texas%20Instruments/view-part/809196/?ref=snap

## Via types
v1: diameter 17.72, hole 7.87, Top Layer to Bottom Layer, tented both sides, 87 vias

## Nets (pads, with @x,y where several pads share a name; then routed paths per layer and width w, separated by ;. In a path a pad name is that pad's centre, name@x,y a point inside that pad or via, vN(x,y) a via of type N, cw(c..) or ccw(c..) an arc to the next point about the centre after c; other vN are vias at no path point)
BUZZ: Q2.2 R20.2 U3.4 | length 1870.4
  Top Layer w10: R20.2 2466.5,1725.5 2476,1735 2514,1735 2521,1742 Q2.2 2520,1771.42 2520,1787.14 2525.86,1793 2558,1793 2569,1782 2569,1543 2595,1517 2658.8,1517 2760.8,1619 v1(2787,1619) ; U3.4 2506.73,2423.86 2512.59,2418 2774,2418 v1@2787,2431
  Bottom Layer w10: v1(2787,1619) 2818,1650 2818,1797 2787.27,1827.73 v1(2787.27,2431.63)
CC: J2.B5 R12.2 | length 124.6
  Top Layer w10: J2.B5@1363.07,1930.28 1362.89,1930.1 J2.B5 1362.77,1930.55 1485.3,1930.55 R12.2
DBG_UART_RX: J2.A8 U3.52 | length 1459
  Top Layer w10: v1@1287.8,2050.21 1275,2037.41 1275,1976 1303.58,1947.42 1329.42,1947.42 1332.18,1950.18 1361.93,1950.18 J2.A8 ; v1@1677,2066.63 1744.52,2066.63 2267.52,2589.63 2338.35,2589.63 U3.52
  Bottom Layer w10: v1(1289.57,2051.22) 1661.22,2051.22 v1@1677,2067
  other v1: 1676.64,2067.41
DBG_UART_TX: J2.B8 U3.51 | length 1229.7
  Top Layer w10: J2.B8 1529.37,2067.9 1546.45,2050.82 1621.82,2050.82 1677,2106 1747.78,2106 2270.78,2629 2338.35,2629 U3.51
DIP1: U3.25 U6.1 | length 1773.8
  Top Layer w10: v1(2067.71,1851.1) 2045.65,1829.05 2045.65,1716.35 2199,1563 U6.1 ; U3.25 2388.81,2796.59 2388.81,2835.81 v1(2389,2836)
  Bottom Layer w10: v1(2067.71,1851.1) 2067.71,1851.96 1972.23,1947.44 1972.23,2112.64 2195.92,2336.32 2345.17,2336.32 2420.7,2411.86 2420.7,2761.91 2389,2793.61 v1(2389,2836)
DIP2: U3.24 U6.2 | length 1997.6
  Top Layer w10: U6.2 2099,1628.67 2021.59,1706.07 2021.59,1882.8 v1(2110.57,1971.78) ; U3.24 v1(2428,2836)
  Bottom Layer w10: v1(2110.57,1971.78) 2274.8,2136 2468,2136 2560,2228 2560,2380.4 2527.38,2413.02 2527.38,2601.88 2560,2634.5 2560,2770 2607,2817 2607,2845.73 2588.88,2863.85 2455.85,2863.85 v1(2428,2836)
DIP3: U3.22 U6.3 | length 1818.2
  Top Layer w10: U6.3 1999,1893 2113,2007 2113,2045 2091,2067 v1(2063,2067) ; U3.22 2506.87,2796.54 2506.87,2835.87 v1(2507,2836)
  Bottom Layer w10: v1(2063,2067) 2194,2198 2442,2198 2501,2257 2501,2340 2465.44,2375.56 2465.44,2649.63 2499.01,2683.19 2499.01,2825.92 2507,2833.91 v1(2507,2836)
DIP4: U3.21 U6.4 | length 1854.7
  Top Layer w10: U6.4 1899,1626.91 1977,1704.91 1977,1900 2093,2016 2093,2033 2085.48,2040.52 2064.48,2040.52 v1(2063,2042) ; v1(2546,2836) 2546.05,2835.95 2546.05,2796.45 U3.21
  Bottom Layer w10: v1(2063,2042) 2083,2042 2219,2178 2450,2178 2520,2248 2520,2355.13 2486.94,2388.19 2486.94,2636.44 2520,2669.5 2520,2810 v1(2546,2836)
DIP5: U3.20 U6.5 | length 1876.5
  Top Layer w10: U6.5 1799,1558.79 1955,1714.79 1955,1908 v1@2063,2016 ; v1(2585,2836) 2585.24,2835.76 2585.24,2796.64 U3.20
  Bottom Layer w10: v1(2062.67,2017.4) 2063.07,2017 2103,2017 2243,2157 2458,2157 2540,2239 2540,2366.96 2507.67,2399.29 2507.67,2620.67 2540,2653 2540,2791 v1(2585,2836)
FSR_AIN: C1.2 R1.2 U1.1 U3.23 | length 834.1
  Top Layer w10: v1(2467,2836) 2467.18,2835.82 2467.18,2796.58 U3.23 ; U1.1 U1.1@2474.8,2269 ; v1(2475.27,2334.63) 2474.93,2334.29 2474.93,2269.14 U1.1@2474.8,2269 ; C1.2 2513.25,2144.39 2531,2162.14 2531,2276.39 2525.14,2282.25 R1.2 2509.49,2281.74 2499.74,2281.74 2487,2269 U1.1@2474.8,2269
  Bottom Layer w10: v1(2467,2836) 2444,2813 2444,2365 v1@2475,2334
GND: C2.2 C3.2 C4.2 C9.2 C10.2 J1.3 J1.5 J2.A1/B12 J2.B1/A12 J2.S1 J2.S2 J2.S3 J2.S4 J4.2 J5.2 P2.2 Q1.1 Q1.4 Q2.1 Q2.4 R3.1 R6.1 R12.1 R19.1 R20.1 R22.1 R25.1 R26.1 SW1.1 SW1.2 U1.2 U2.A2 U3.6 U3.12 U3.14 U3.26 U3.30 U3.53 U4.A2 U5.2 U6.6 U6.7 U6.8 U6.9 U6.10 | length 2705.1
  Top Layer w10: J2.B1/A12 1362.32,1820.46 J2.S2 1370.78,1766.72 v1(1400.01,1766.72) ; J2.A1/B12 1362.32,2167.27 J2.S1@1365.69,2170.63 ; J2.B1/A12 v1(1396,1873) ; J2.A1/B12 v1(1397,2125) ; J2.S2@1364.61,1824.31 v1@1398.27,1824.31 ; v1(1395,2198) 1341.87,2198 J2.S1 ; v1(1397,2228) 1367.5,2228 J2.S1 ; v1(1398,1239) 1372.23,1239 J5.2 ; v1(1398,2161) 1396.73,2162.27 1374.06,2162.27 J2.S1@1365.69,2170.63 ; v1(1399,1308) 1377.02,1308 1346.58,1277.57 J5.2 ; v1(1399,2367) 1377.02,2367 1346.58,2397.43 J4.2 ; v1(1399,2448) 1377.02,2448 1346.58,2417.57 J4.2 ; v1(1400,1271) 1352.94,1271 J5.2 ; v1(1400,2408) 1348.94,2408 J4.2 ; v1(1445,2779) 1445.87,2779.87 U2.A2 ; U4.A2 1454.18,1670.14 v1@1458.53,1670.14 ; v1(1470,2160) 1470.5,2159.5 1470.5,2140.5 C3.2 ; v1(1555.04,2096.07) 1555.51,2096.54 1578.35,2096.54 ; v1@1578.35,2079.09 1578.35,2096.54 ; 1578.35,2101.09 1578.35,2096.54 ; 1578.54,2096.54 1578.35,2096.54 ; 1579,2097 U5.2 ; 1580.42,2087.45 1580.79,2087.45 1581.09,2087.75 C4.2 ; v1(1853,2584) 1890.65,2584 SW1.2@1892.65,2586.01 ; SW1.1@2097.68,2586.98 2100.18,2584.48 v1(2100.18,2551.62) ; v1(2312.64,2555.87) 2312.94,2555.56 2343.04,2555.56 U3.53 U3.30 ; v1(2417,1762) R22.1 2417.13,1744.13 2442.87,1744.13 R20.1 ; v1(2418.81,2370.98) 2435.39,2370.98 2441.25,2365.12 R3.1 2441.38,2348.87 2441.38,2319.13 C2.2 2441.5,2303.62 2448.32,2296.81 2448.32,2269.48 U1.2 ; v1(2477,1697) 2477.29,1697.29 2495.12,1697.29 Q2.4 ; R6.1 2529.73,2121.1 2536.79,2128.17 v1(2538.88,2128.17) ; Q2.1 2546.8,1770.21 2546.8,1746.2 v1(2547,1746) ; v1(2585,2440) 2585.24,2440.24 2585.24,2471.36 U3.6 ; v1(2594.72,1281.13) 2603.97,1281.13 2714.68,1170.43 2848.25,1170.43 2908.72,1230.9 2908.72,1363.49 2877.42,1394.79 Q1.1 ; v1(2619,2142) J1.3 ; v1(2668,2141) 2668,2201.23 J1.5 ; v1(2681.87,1491.97) 2683.34,1493.45 2697.2,1493.45 2739.84,1536.09 2740.24,1536.09 2740.75,1536.61 R26.1 2740.32,1537.42 2740.32,1550.05 2752.86,1562.59 Q1.4 2804.58,1580.53 2841.05,1617 R25.1 ; v1(2697.82,2594.39) 2697.94,2594.51 2739.88,2594.51 U3.12 ; v1(2700.82,2673.39) U3.14 ; J2.S1 1339.68,2196.64 J2.S1@1365.69,2170.63
  Top Layer w15: C10.2 v1(1564,1259) ; C9.2 v1(1628,1259)
  other v1: 1798,1223 1458,1671 1399.11,1824.21 1528.76,1931.18 1578.56,2074.25 2390,2733
HAPTIC: Q2.5 R22.2 U3.3 | length 1241
  Top Layer w10: U3.3 2458.96,2463.2 2458.96,2433.96 2440,2415 2433,2415 2149.23,2131.23 2149.23,1869.26 2292.74,1725.75 R22.2 2417,1684 2431,1670 2515,1670 2521,1676 Q2.5
LEDG: Q1.5 R26.2 U3.2 | length 2824.8
  Top Layer w10: U3.2 2426.63,2470.24 2426.63,2439.82 2418.72,2431.91 2379.92,2431.91 1731,1782.99 1731,1457.16 1889.46,1298.69 2224.24,1298.69 2288.2,1234.74 2288.2,1188.39 2311.99,1164.59 2467.37,1164.59 2509,1206.23 2509,1399 2573.67,1463.67 2702.67,1463.67 2759.25,1520.25 R26.2 Q1.5
LEDR: Q1.2 R25.2 U3.1 | length 3030.6
  Top Layer w10: U3.1 2388.62,2462.74 2361.44,2435.56 2352.59,2435.56 1705.97,1788.94 1705.97,1445.99 1874.83,1277.13 2213.03,1277.13 2267.18,1222.97 2267.18,1179.68 2304.27,1142.59 2477.24,1142.59 2531,1196.35 2531,1388 2585,1442 2731,1442 v1@2770,1481 ; v1(2851.17,1522.39) 2852.65,1523.87 2852.65,1526.87 2860.89,1535.11 2875.53,1535.11 Q1.2 2895.14,1537 2901,1542.86 2901,1612.14 2896.05,1617.09 2888.76,1617.09 2888.25,1617.61 R25.2@2888.25,1618
  Bottom Layer w10: v1(2771,1482) 2824.24,1482 2835.55,1493.31 2835.55,1504.69 2851.17,1520.31 v1(2851.17,1522.39)
NetC1_1: C1.1 P2.1 R1.1 R6.2 U1.4 | length 436.8
  Top Layer w10: P2.1 2383,2096 2381.25,2097.75 2381.25,2172.25 2402.2,2193.2 U1.4 2423.41,2153.59 2433,2144 C1.1 ; R6.2 2494.88,2121.24 2494.88,2143.87 C1.1 ; R1.1 2510,2180 2495,2165 2495,2144.25 C1.1
NetC2_1: C2.1 R2.1 R3.2 U1.3 | length 111.2
  Top Layer w10: R2.1 C2.1 ; R3.2 2422.87,2348.87 2422.87,2319.13 C2.1 ; U1.3 2423.2,2269 2423.2,2318.8 C2.1
NetD1_2: D1.2 R9.2 | length 179.8
  Top Layer w10: R9.2 2799,1396 2775,1372 2775,1284 2784,1275 2806.01,1275 D1.2
NetD1_3: D1.3 R10.2 | length 279.8
  Top Layer w10: D1.3 2862.94,1216.94 2892,1246 2892,1336 2825,1403 R10.2
NetD2_2: D2.2 Q2.6 R11.1 U7.2 | length 513.5
  Top Layer w10: U7.2 2379.74,1387.74 2500.63,1508.63 D2.2 2500.63,1612.63 2547,1659 2547,1697.17 Q2.6 ; R11.1 2498.92,1559.11 D2.2@2499.49,1559.68
NetD3_2: D3.2 P1.2 Q2.3 | length 343.2
  Top Layer w10: Q2.3 2495.41,1796.41 2508.37,1809.37 D3.2 2763.63,1809.37 2773,1800 2773,1771 P1.2
NetJ2_A5: J2.A5 R19.2 | length 98.9
  Top Layer w10: J2.A5 1425.54,2048.21 1427.26,2046.49 R19.2@1460.48,2046.49
NetJ4_1: J4.1 R7.2 R8.2 U2.B1 | length 270.6
  Top Layer w10: J4.1@1484.98,2579.12 1480.87,2583.23 U2.B1 1514.43,2764.13 1520.67,2757.88 1520.67,2716.53 R7.2@1520.77,2716.43
NetJ5_1: J5.1 R13.2 R14.2 U4.B1 | length 290
  Top Layer w10: J5.1@1428.77,1442.24 1429.25,1442.72 U4.B1 ; 1433.69,1588.6 R14.2@1491.99,1588.6 ; R14.2@1491.59,1588.99 R14.2@1491.99,1588.6 ; R13.2 1492.52,1588.06 R14.2@1491.99,1588.6
NetQ1_3: Q1.3 R10.1 | length 159.8
  Top Layer w10: R10.1 2825,1458 2828.21,1461.21 2828.21,1535.21 2855.59,1562.59 Q1.3
NetQ1_6: Q1.6 R9.1 | length 77.5
  Top Layer w10: R9.1 2799,1456 2804.58,1461.58 Q1.6
NetR5_1: R5.1 U5.6 | length 34.5
  Top Layer w10: R5.1 1525.19,2196.44 1559.12,2196.44 U5.6
NetTP2_1: TP2.1 U3.50 | length 108.5
  Top Layer w10: TP2.1 2235.18,2673.18 2343.16,2673.18 U3.50
NetTP3_1: TP3.1 U3.49 | length 122.3
  Top Layer w10: TP3.1 2265.26,2712.74 U3.49
nRESET: J1.10 R4.1 SW1.3 SW1.4 U3.19 | length 1951.4
  Top Layer w10: SW1.4@1889.06,2711.52 SW1.4 SW1.3 ; SW1.3@2099.35,2711.99 2100.09,2711.25 R4.1 ; v1@2153,2856 2173.16,2876.16 2286.08,2876.16 2286.24,2876 2291.53,2876 2303.88,2863.65 2478.85,2863.65 2491.2,2876 2511.76,2876 2511.92,2876.16 2624.84,2876.16 ; U3.19 2624.84,2876.16 ; J1.10 2769,2385.49 2779,2395.49 2792.49,2395.49 2835,2438 2835,2509 2818,2526 2696.86,2526 2691,2531.86 2691,2544 2670,2565 2670,2657.21 2670.13,2657.35 2670.13,2706.13 2716,2752 2785,2752 2800,2767 2800,2840 2763.84,2876.16 2624.84,2876.16
  Bottom Layer w10: v1(2153,2855) 2154,2854 2154,2712 v1(2155,2711)
SCL1: J4.4 J4.4.1 R17.1 U2.A1 U3.48 | length 1825.6
  Top Layer w10: J4.4 1189.1,2477.1 1234,2522 1234,2604 1189,2649 1189,2755.94 J4.4.1 1262.96,2756.04 1280,2739 1280,2666 1297,2649 1437,2649 1456.06,2668.06 v1(1456.06,2737.85) v1@1456.06,2738.14 ; v1@1455.37,2737.73 1457.54,2739.89 1457.54,2756.54 U2.A1 ; v1(1521,2794) 1522,2795 1588,2795 ; R17.1 1585.75,2792.75 1588,2795 ; U3.48 2343.24,2752 2308,2752 2265,2795 1588,2795
  Bottom Layer w10: v1(1456.06,2737.85) 1457.64,2737.85 1513.79,2794 v1(1521,2794)
SCL2: J5.4 J5.4.1 R16.2 U3.16 U4.A1 | length 3986.8
  Top Layer w10: J5.4 1189.1,1324.1 1251,1386 1251,1470 1189.1,1531.9 J5.4.1 1259.96,1615.04 1281,1594 1281,1522 1293,1510 1389,1510 1406,1527 1406,1652 1415,1661 U4.A1 1429.25,1687.75 v1(1429,1688) ; v1(1506,1627) R16.2 ; U3.16 v1(2743,2837)
  Bottom Layer w10: v1(1506,1627) 1504.52,1628.48 1504.52,1677.48 1481.06,1700.94 1441.94,1700.94 v1(1429,1688) 1429,1538 1677.58,1289.42 2321.58,1289.42 2743,1710.85 v1(2743,2837)
SDA1: J4.3 R18.1 U2.B2 U3.47 | length 1148.6
  Top Layer w10: J4.3 1358.55,2748.32 1358.55,2804.55 1386,2832 1453,2832 1481,2804 ; U2.B2 1481,2780 1481,2804 ; R18.1 1584.75,2820.25 1585,2820 ; U3.47 2314.83,2820 1601,2820 1585,2820 ; 1481,2804 1497,2820 1585,2820
SDA2: J5.3 R15.2 U3.17 U4.B2 | length 3137.4
  Top Layer w10: J5.3 1346.58,1664.58 1391.4,1709.4 1462.6,1709.4 1484.1,1687.9 1484.1,1671.1 1484.18,1671.18 1484.18,1660.31 ; v1(1452,1619) 1452,1621.09 1445,1628.09 U4.B2 1445.25,1645 1467,1645 1473,1651 1473,1651.13 1481.87,1660 R15.2 ; U3.17 2703.79,2796.61 2703.79,2836.79 v1(2704,2837)
  Bottom Layer w10: v1(1452,1619) 1452,1553 1688,1317 2294,1317 2723,1746 2723,2818 v1(2704,2837)
SWDCLK: J1.4 U3.11 | length 645
  Top Layer w10: J1.4 2619,2299 2625,2293 2828,2293 2863,2328 2863,2516 2824,2555 2740.26,2555 U3.11
SWDIO: J1.2 U3.15 | length 876.3
  Top Layer w10: J1.2 2569,2323.77 2618.77,2274 2841,2274 2881.81,2314.81 2881.81,2634.19 2803,2713 2740.26,2713 U3.15
USB_N: J2.A7 J2.B7 U3.55 | length 1336.6
  Top Layer w10: J2.A7 1311.86,1989.16 1306,1995.02 1306,2022.67 1311.86,2028.53 J2.B7 ; J2.A7@1363.32,1988.84 1410,1988.84
  Top Layer w15: 1409,1989 1800.3,1989 2298,2486.7 2333.16,2486.7 U3.55
USB_P: J2.A6 J2.B6 U3.54 | length 1322.5
  Top Layer w10: v1(1315,1967) 1317,1969 J2.B6@1361.85,1969 ; v1@1325.08,2008.92 J2.A6@1362.24,2008.92 ; J2.A6 1409,2008.84
  Top Layer w15: v1(1325,2009) v1@1325.08,2008.92 ; 1409,2008 1792.43,2008 2290.13,2505.7 2333.16,2505.7 U3.54
  Bottom Layer w15: v1(1315,1967) 1315,1967.74 1324.91,1977.64 1324.91,2008.91 v1(1325,2009)
VBUS: C3.1 J2.A4/B9 J2.B4/A9 R5.2 R7.1 R13.1 U3.31 U5.1 | length 2985.2
  Top Layer w10: v1@1496.18,2236.12 1496.18,2186.24 1504.79,2177.62 R5.2@1522.58,2177.62 ; R13.1@1510.81,1560.66 1540.98,1560.66 1581.59,1601.26 1581.59,1819.88 1496.95,1904.51 J2.B4/A9 1355.52,1911.32 1324.68,1911.32 1324.51,1911.14 1275.55,1911.14 1225.54,1961.15 1225.54,2059.72 1255.82,2090 1358.83,2090 J2.A4/B9 1365.81,2090 1467,2090 C3.1 1522.16,2094 1558.8,2130.65 1558.8,2152.82 U5.1 1534.67,2153.33 1525,2163 R5.2 ; R7.1 1554.26,2716.07 1560.12,2710.21 v1@1560.12,2321.55 ; v1(2376.94,2520.83) 2382.11,2526 2445.44,2526 U3.31
  Bottom Layer w10: v1(1495.4,2236.12) 1557.66,2298.38 1557.66,2319.66 v1@1559.94,2321.95 ; v1@1530,2158 1839,2158 2264,2583 2314.77,2583 v1(2376.94,2520.83)
  other v1: 1529.98,2157.14 1559.13,2321.55
VDD_3V3: C4.1 C9.1 C10.1 D1.1 D2.1 D3.1 J1.1 P1.1 R2.2 R4.2 R8.1 R11.2 R14.1 R15.1 R16.1 R17.2 R18.2 U1.5 U3.9 U3.10 U5.3 U7.1 | length 5138
  Top Layer w10: v1@1283.92,1707.76 1354.89,1707.76 1379.81,1732.68 1516.24,1732.68 1551.25,1697.67 R15.1 R16.1 1551.25,1611.25 ; v1@1302,2889 1580,2889 1603.09,2865.91 1603.09,2845.16 R18.2 ; R14.1@1511.09,1588.97 1528.79,1588.97 1550.98,1611.16 ; R8.1 1596.8,2740.45 ; 1597.88,2276.88 1597.88,2752 1603.74,2757.86 1603.74,2768.49 R17.2 ; U5.3 1598.69,2130.86 1604.54,2125 1619,2125 1625,2119 1625,2097 ; 1626,2239 1823.47,2436.47 2038.47,2436.47 2182,2580 R4.2 ; v1@2324.53,1197.6 2324.53,1520.63 2363.02,1559.11 R11.2 ; R2.2 2373.75,2318.61 2310,2254.86 2310,2228 ; U1.5 2474,2193.8 2474,2209.35 2453.35,2230 2312,2230 2310,2228 ; J1.1 2569,2131 2579,2121 2762,2121 2812,2071 v1(2812,2026) ; U7.1@2722,1307.74 U7.1 ; v1@2811.66,2026.34 2810.52,2025.21 2810.52,2019.07 2810,2018.54 2810,1888 2766,1844 2211.74,1844 2173.67,1882.08 2173.67,2091.67 2310,2228
  Top Layer w15: v1(1564,1163) C10.1 ; v1(1628,1164) C9.1 ; v1(2722,1211) U7.1@2722,1307.74 ; D1.1 2834.94,1324.84 2834.94,1315.06 v1(2857,1293)
  Top Layer w20: D2.1 2629.37,1666.37 2643.63,1680.63 D3.1 2767.63,1680.63 2774,1687 P1.1 ; U3.9@2703.58,2471 v1(2807,2471)
  other v1: 2324.81,1199.21 1284.3,1706.99 1245,2284 1275,2284 1305,2284 2782.27,2470.63 1291,2527 1291,2562 1291,2595 1302.13,2889.33
pads on no net: J1.6 J1.7 J1.8 J1.9 J2. J4.None J5.None U3.5 U3.7 U3.8 U3.13 U3.18 U3.27 U3.28 U3.29 U3.32 U3.33 U3.34 U3.35 U3.36 U3.37 U3.38 U3.39 U3.40 U3.41 U3.42 U3.43 U3.44 U3.45 U3.46 U3.EGP1 U3.EGP2 U3.EGP3 U3.EGP4 U3.EGP5 U3.EGP6 U3.EGP7 U3.EGP8 U3.EGP9 U3.EGP10 U3.EGP11 U3.EGP12 U5.4 U5.5

## Polygon pours and split planes (outlines as drawn)
VDD_3V3 on Bottom Layer "VDD_3V3_L02_P009" (solid, pour order 9): 1028,2984.69 1028,1043.84 2981,1043.84 2981,2983.69
GND on Bottom Layer "GND_L02_P000" (solid, pour order 0): 2625.69,1212 2702,1288.82 2702,2953.14 1326,2953.85 1326,1256.45 1327.94,1256.45 1372.39,1212
GND on Top Layer "GND_L01_P008" (solid, pour order 8): 1028,2980.85 1028,1040 2981,1040 2981,2979.84
VDD_3V3 on Top Layer "VDD_3V3_L01_P001" (solid, pour order 1): 1632,2302 1665,2269 1665,2107 1634,2076 1610,2076 1594,2092 1594,2221 1563,2252 1223,2252 1208,2267 1208,2287 1226,2302
GND on Top Layer "GND_L01_P007" (solid, pour order 7): 2176.74,2002.03 2591.74,2002.03 2591.74,1906.03 2176.74,1906.03
NetC1_1 on Top Layer "NETC1_1_L01_P005" (solid, pour order 5): 2176.39,2101.91 2591.39,2101.91 2591.39,2001.54 2176.39,2001.54
VDD_3V3 on Top Layer "VDD_3V3_L01_P002" (solid, pour order 2): 1283,2625 1259,2601 1259,2515 1281,2493 1473,2493 1497,2517 1497,2602 1474,2625
no net on Top Solder "NONET_L-01_P-001" (solid): 2189.83,1988.4 2575.83,1988.4 2575.83,1914.4 2189.83,1914.4
no net on Top Solder "NONET_L-01_P-001" (solid): 2191.62,2087.7 2577.62,2087.7 2577.62,2013.7 2191.62,2013.7

## Silkscreen, mask and mechanical layers (free items; w line width, h text height)
Top Overlay:
  text "FSR" at 2768.81,1927.31 h60 r90
  text "IJA@GB / 7E8C(" at 2129.74,1616.78 h200 r90
  text "MIMOSA HOST" at 1798.57,1605.52 h130 r90
Bottom Overlay:
  lines w10: 1107.86,2839.56 1107.86,2887.42 1155.93,2887.42 ; 1108.34,1159.9 1108.34,1111.83 1156.2,1111.83 ; 2843.41,2888.5 2891.27,2888.5 2891.27,2840.43 ; 2845.3,1113.8 2893.37,1113.8 2893.37,1161.66
Outline:
  drawing of 308 lines, arcs and shapes, not listed

## Text inside footprints (layer, text, board x,y; h text height)
J1: PCB Text "0.134in/3.404mm" at 1936.5,2300 h25; PCB Text "0.067in/1.702mm" at 2036.5,2300 h25; PCB Text "0.3in/7.62mm" at 2174,2416.5 h25; PCB Text "0in/0mm" at 2336.5,2266.5 h25; PCB Text "0.154in/3.9mm" at 2914,2266.5 h25; PCB Text "0.25in/6.35mm" at 2587.75,2766 h25; PCB Text "0.171in/4.35mm" at 2581.5,2666 h25; PCB Text "0.05in/1.27mm" at 2512.75,2466 h25
SW1: PCB Text "Default Padstyle: RX61Y39D0T" at 2345.79,2942.03 h50 r180; PCB Text "Pin 1 Padstyle: RX61Y39D0T" at 2320.79,3002.03 h50 r180; PCB Text "Alt 1 Padstyle: OX60Y90D30P" at 2333.29,3182.03 h50 r180; PCB Text "Alt 2 Padstyle: OX90Y60D30P" at 2333.29,3242.03 h50 r180; PCB Text "0.264in/6.706mm" at 2089.54,2435.03 h25 r180; PCB Text "0.187in/4.75mm" at 1772.44,2661.03 h25 r180
U6: Top Overlay "OFF" at 2288,1500.5 h50 r270; Top Overlay "ON" at 2288,1224 h50 r270; PCB Text "0.558in/14.173mm" at 1986.5,1041.5 h25 r270; PCB Text "0.264in/6.706mm" at 2398,1424.75 h25 r270; PCB Text "Alt 2 Padstyle: OX90Y60D30P" at 1220,1668.5 h50 r270; PCB Text "Alt 1 Padstyle: OX60Y90D30P" at 1280,1668.5 h50 r270; PCB Text "Default Padstyle: OX96Y44D0T" at 1460,1681 h50 r270; Mechanical 13 "OFF" at 2288,1500.5 h50 r270; Mechanical 13 "ON" at 2288,1224 h50 r270